# EAGLE board CT_schematic (EAGLE 7.6.0)

Size 100 x 80 mm. Coordinates in mm from the lower left corner, seen from the top.
Outline: 0,0 100,0 100,80 0,80 0,0
Copper layers (1*16): Top 0.035mm / dielectric 1.5mm / Bottom 0.035mm
Design rules "default": minimum track width 10mil, minimum drill 24mil, track to track 8mil, track to pad 8mil, pad to pad 8mil, via to via 8mil, smd to smd 8mil, copper to edge 40mil, drill to drill 8mil, minimum pad ring 10mil, minimum via ring 8mil, stop-mask expansion 4mil, vias tented up to drill 0mil, thermal gap 10mil

## Footprints (pad centres in the part's own frame; a part is rotated, then mirrored left to right if it is on the bottom)
C0603 = smd 0.8 x 0.8: 1 -0.762,0; 2 0.762,0
C0402 = smd 0.5 x 0.5: 1 -0.508,0; 2 0.508,0
C0805 = smd 1.2 x 1.3: 1 -1.016,0; 2 1.016,0
C1210 = smd 1.2 x 2.5: 1 -1.524,0; 2 1.524,0
R0603 = smd 0.8 x 0.8: 1 -0.762,0; 2 0.762,0
EXV-9H = smd 3.505 x 1.676: 1 -2.857,0; 2 2.857,0
L0603 = smd 0.8 x 0.8: 1 -0.762,0; 2 0.762,0
PJ-037B_PACKAGE = drill 3.7 square: 1 12,0 | drill 3.2 square: 2 6,0
LQFP144 = smd 0.35 x 1.35: 1 -8.75,-10.625; 2 -8.25,-10.625; 3 -7.75,-10.625; 4 -7.25,-10.625; 5 -6.75,-10.625; 6 -6.25,-10.625; 7 -5.75,-10.625; 8 -5.25,-10.625; 9 -4.75,-10.625; 10 -4.25,-10.625; 11 -3.75,-10.625; 12 -3.25,-10.625; 13 -2.75,-10.62; 14 -2.25,-10.625; 15 -1.75,-10.625; 16 -1.25,-10.625; 17 -0.75,-10.625; 18 -0.25,-10.625; 19 0.25,-10.625; 20 0.75,-10.625; 21 1.25,-10.625; 22 1.75,-10.625; 23 2.25,-10.625; 24 2.75,-10.62; 25 3.25,-10.625; 26 3.75,-10.625; 27 4.25,-10.625; 28 4.75,-10.625; 29 5.25,-10.625; 30 5.75,-10.625; 31 6.25,-10.625; 32 6.75,-10.625; 33 7.25,-10.625; 34 7.75,-10.625; 35 8.25,-10.625; 36 8.75,-10.625; 73 8.75,10.625; 74 8.25,10.625; 75 7.75,10.625; 76 7.25,10.625; 77 6.75,10.625; 78 6.25,10.625; 79 5.75,10.625; 80 5.25,10.625; 81 4.75,10.625; 82 4.25,10.625; 83 3.75,10.625; 84 3.25,10.625; 85 2.75,10.625; 86 2.25,10.625; 87 1.75,10.625; 88 1.25,10.625; 89 0.75,10.625; 90 0.25,10.625; 91 -0.25,10.625; 92 -0.75,10.625; 93 -1.25,10.625; 94 -1.75,10.625; 95 -2.25,10.625; 96 -2.75,10.625; 97 -3.25,10.625; 98 -3.75,10.625; 99 -4.25,10.625; 100 -4.75,10.625; 101 -5.25,10.625; 102 -5.75,10.625; 103 -6.25,10.625; 104 -6.75,10.625; 105 -7.25,10.625; 106 -7.75,10.625; 107 -8.25,10.625; 108 -8.75,10.625 | smd 1.35 x 0.35: 37 10.625,-8.75; 38 10.625,-8.25; 39 10.625,-7.75; 40 10.625,-7.25; 41 10.625,-6.75; 42 10.625,-6.25; 43 10.625,-5.75; 44 10.625,-5.25; 45 10.625,-4.75; 46 10.625,-4.25; 47 10.625,-3.75; 48 10.625,-3.25; 49 10.625,-2.75; 50 10.625,-2.25; 51 10.625,-1.75; 52 10.625,-1.25; 53 10.625,-0.75; 54 10.625,-0.25; 55 10.625,0.25; 56 10.625,0.75; 57 10.625,1.25; 58 10.625,1.75; 59 10.625,2.25; 60 10.625,2.75; 61 10.625,3.25; 62 10.625,3.75; 63 10.625,4.25; 64 10.625,4.75; 65 10.625,5.25; 66 10.625,5.75; 67 10.625,6.25; 68 10.625,6.75; 69 10.625,7.25; 70 10.625,7.75; 71 10.625,8.25; 72 10.625,8.75; 109 -10.625,8.75; 110 -10.625,8.25; 111 -10.625,7.75; 112 -10.625,7.25; 113 -10.625,6.75; 114 -10.625,6.25; 115 -10.625,5.75; 116 -10.625,5.25; 117 -10.625,4.75; 118 -10.625,4.25; 119 -10.625,3.75; 120 -10.625,3.25; 121 -10.625,2.75; 122 -10.625,2.25; 123 -10.625,1.75; 124 -10.625,1.25; 125 -10.625,0.75; 126 -10.625,0.25; 127 -10.625,-0.25; 128 -10.625,-0.75; 129 -10.625,-1.25; 130 -10.625,-1.75; 131 -10.625,-2.25; 132 -10.625,-2.75; 133 -10.625,-3.25; 134 -10.625,-3.75; 135 -10.625,-4.25; 136 -10.625,-4.75; 137 -10.625,-5.25; 138 -10.625,-5.75; 139 -10.625,-6.25; 140 -10.625,-6.75; 141 -10.625,-7.25; 142 -10.625,-7.75; 143 -10.625,-8.25; 144 -10.625,-8.75
A2500R24A00GM = smd 1.5 x 0.61: 1 -3,7; 2 -3,6; 3 -3,5; 4 -3,4; 5 -3,3; 6 -3,2; 7 -3,1; 8 -3,0; 17 5.22,0; 18 5.22,1; 19 5.22,2; 20 5.22,3; 21 5.22,4; 22 5.22,5; 23 5.22,6; 24 5.22,7 | smd 0.61 x 1.5: 9 -2.39,-1.6; 10 -1.39,-1.6; 11 -0.39,-1.6; 12 0.61,-1.6; 13 1.61,-1.6; 14 2.61,-1.6; 15 3.61,-1.6; 16 4.61,-1.6 | smd 1 x 1: 25 -2.8,9; 26 -2.8,13; 27 5.02,9; 28 5.02,13; 29 0.11,5.75; 30 2.11,5.75
AT24C02D = smd 1.6 x 0.6: 1 -2.475,1.905 | smd 1.55 x 0.6: 2 -2.475,0.635; 3 -2.475,-0.635; 4 -2.475,-1.905; 5 2.475,-1.905; 6 2.475,-0.635; 7 2.475,0.635; 8 2.475,1.905
SOIC-8 = smd 1.6 x 0.6: 1 -2.7,1.905 | smd 1.55 x 0.6: 2 -2.7,0.635; 3 -2.7,-0.635; 4 -2.7,-1.905; 5 2.7,-1.905; 6 2.7,-0.635; 7 2.7,0.635; 8 2.7,1.905
182-009-MALE = drill 1.194 pad 1.524 octagon: 1 -5.537,10.923; 2 -2.769,10.923; 3 0,10.923; 4 2.769,10.923; 5 5.537,10.923; 6 -4.153,8.08; 7 -1.384,8.08; 8 1.384,8.08; 9 4.153,8.08 | hole 3.048: -12.446,9.501; 12.446,9.501
VFBGA-63 = smd 0.4 x 0.4: A1 -3.6,4.4; A2 -2.8,4.4; A9 2.8,4.4; A10 3.6,4.4; B1 -3.6,3.6; B9 2.8,3.6; B10 3.6,3.6; C3 -2,2.8; C4 -1.2,2.8; C5 -0.4,2.8; C6 0.4,2.8; C7 1.2,2.8; C8 2,2.8; D3 -2,2; D4 -1.2,2; D5 -0.4,2; D6 0.4,2; D7 1.2,2; D8 2,2; E3 -2,1.2; E4 -1.2,1.2; E5 -0.4,1.2; E6 0.4,1.2; E7 1.2,1.2; E8 2,1.2; F3 -2,0.4; F4 -1.2,0.4; F5 -0.4,0.4; F6 0.4,0.4; F7 1.2,0.4; F8 2,0.4; G3 -2,-0.4; G4 -1.2,-0.4; G5 -0.4,-0.4; G6 0.4,-0.4; G7 1.2,-0.4; G8 2,-0.4; H3 -2,-1.2; H4 -1.2,-1.2; H5 -0.4,-1.2; H6 0.4,-1.2; H7 1.2,-1.2; H8 2,-1.2; J3 -2,-2; J4 -1.2,-2; J5 -0.4,-2; J6 0.4,-2; J7 1.2,-2; J8 2,-2; K3 -2,-2.8; K4 -1.2,-2.8; K5 -0.4,-2.8; K6 0.4,-2.8; K7 1.2,-2.8; K8 2,-2.8; L1 -3.6,-3.6; L2 -2.8,-3.6; L9 2.8,-3.6; L10 3.6,-3.6; M1 -3.6,-4.4; M2 -2.8,-4.4; M9 2.8,-4.4; M10 3.6,-4.4
ABS07-32.768KHZ-7-T = smd 1.1 x 2.4: 1 -2.5,0; 2 0,0
ASFL1 = smd 1.7 x 1.5: 1 -1.27,-1.1; 2 1.27,-1.1; 3 1.27,1.1; 4 -1.27,1.1
WSON-8 = smd 0.3 x 0.6: 1 -0.75,0; 2 0.05,0; 3 0.85,0; 4 1.65,0; 5 1.65,3.8; 6 0.85,3.8; 7 0.05,3.8; 8 -0.75,3.8 | smd 3 x 2.6: PAD 0.45,1.9
SON-6 = smd 0.55 x 0.3: 1 -0.355,0.5 | smd 0.52 x 0.3: 2 -0.37,0; 3 -0.37,-0.5; 4 0.37,-0.5; 5 0.37,0; 6 0.37,0.5
SW_4-1437565-2 = smd 1.4 x 2.1: 1 -2.23,4.55; 2 -2.23,-4.55; 3 2.23,4.55; 4 2.23,-4.55
LGM67K-G1J2-24-Z = smd 0.8 x 1.4: A -2,0; C 0,0
NC7SZ125M5X = smd 1.3 x 0.7: 1 -1.3,0.95; 2 -1.3,0; 3 -1.3,-0.95; 4 1.3,-0.95; 5 1.3,0.95
DUMMY_PACKAGE_199 = drill 0.3: 1 0,-1; 2 1.5,-1; 3 3,-1

## Placement (x,y rotation side)
C1  1e-06  [C0603]  -80.01,83.82 0 top  (outside the outline)
C2  1e-07  [C0603]  -83.82,83.82 0 top  (outside the outline)
C3  1e-07  [C0603]  -15.24,88.9 0 top  (outside the outline)
C4  1e-07  [C0603]  -19.05,88.9 0 top  (outside the outline)
C5  1e-07  [C0603]  -22.86,88.9 0 top  (outside the outline)
C6  1e-07  [C0603]  -26.67,88.9 0 top  (outside the outline)
C7  1e-07  [C0603]  -30.48,88.9 0 top  (outside the outline)
C8  1e-07  [C0603]  -34.29,88.9 0 top  (outside the outline)
C9  1e-07  [C0603]  -38.1,88.9 0 top  (outside the outline)
C10  1e-07  [C0603]  -41.91,88.9 0 top  (outside the outline)
C11  1e-07  [C0603]  -45.72,88.9 0 top  (outside the outline)
C12  1e-07  [C0603]  -49.53,88.9 0 top  (outside the outline)
C13  1e-07  [C0603]  -53.34,88.9 0 top  (outside the outline)
C14  4.7e-06  [C0603]  -64.77,83.82 0 top  (outside the outline)
C15  2.2e-06  [C0603]  -68.58,83.82 0 top  (outside the outline)
C16  2.2e-06  [C0603]  -72.39,83.82 0 top  (outside the outline)
C17  1e-08  [C0603]  -57.15,88.9 0 top  (outside the outline)
C18  1e-06  [C0603]  -60.96,88.9 0 top  (outside the outline)
C19  1e-07  [C0603]  -64.77,88.9 0 top  (outside the outline)
C20  1e-11  [C0402]  -41.91,93.98 0 top  (outside the outline)
C21  1e-11  [C0402]  -45.72,93.98 0 top  (outside the outline)
C22  1e-05  [C0805]  -83.82,71.12 0 top  (outside the outline)
C23  1e-08  [C0402]  -49.53,93.98 0 top  (outside the outline)
C24  1e-06  [C0603]  -68.58,88.9 0 top  (outside the outline)
C25  1e-06  [C0603]  -72.39,88.9 0 top  (outside the outline)
C26  1e-07  [C0402]  -53.34,93.98 0 top  (outside the outline)
C27  1e-07  [C0402]  -57.15,93.98 0 top  (outside the outline)
C28  1e-07  [C0402]  -60.96,93.98 0 top  (outside the outline)
C29  1e-07  [C0402]  -64.77,93.98 0 top  (outside the outline)
C30  2.2e-06  [C0603]  -76.2,83.82 0 top  (outside the outline)
C31  1e-08  [C0402]  -68.58,93.98 0 top  (outside the outline)
C32  1e-08  [C0402]  -72.39,93.98 0 top  (outside the outline)
C33  1e-05  [C1210]  -59.69,72.39 0 top  (outside the outline)
C34  1e-05  [C0805]  -15.24,78.74 0 top  (outside the outline)
C35  8e-07  [R0603]  -76.2,88.9 0 top  (outside the outline)
C36  1e-05  [C1210]  -66.04,72.39 0 top  (outside the outline)
C37  8e-07  [R0603]  -80.01,88.9 0 top  (outside the outline)
C38  1e-05  [C1210]  -72.39,72.39 0 top  (outside the outline)
C39  1e-07  [C0402]  -76.2,93.98 0 top  (outside the outline)
C40  0.0001  [EXV-9H]  -72.39,63.5 0 top  (outside the outline)
C41  0.0001  [EXV-9H]  -17.78,72.39 0 top  (outside the outline)
C42  1e-08  [C0402]  -80.01,93.98 0 top  (outside the outline)
F1  240.0  [L0603]  -83.82,88.9 0 top  (outside the outline)
J1  PJ-037B  [PJ-037B_PACKAGE]  -67.31,33.02 0 top  (outside the outline)
R2  1000.0  [R0603]  -15.24,93.98 0 top  (outside the outline)
R4  4700.0  [R0603]  -19.05,93.98 0 top  (outside the outline)
R5  2200.0  [R0603]  -22.86,93.98 0 top  (outside the outline)
R6  2200.0  [R0603]  -26.67,93.98 0 top  (outside the outline)
R7  10000.0  [R0603]  -66.04,78.74 0 top  (outside the outline)
R8  10000.0  [R0603]  -71.12,78.74 0 top  (outside the outline)
R9  10000.0  [R0603]  -76.2,78.74 0 top  (outside the outline)
R10  10000.0  [R0603]  -81.28,78.74 0 top  (outside the outline)
R11  10000.0  [R0603]  -15.24,83.82 0 top  (outside the outline)
R12  10000.0  [R0603]  -20.32,83.82 0 top  (outside the outline)
R13  120.0  [R0603]  -30.48,93.98 0 top  (outside the outline)
R14  10000.0  [R0603]  -25.4,83.82 0 top  (outside the outline)
R15  10000.0  [R0603]  -30.48,83.82 0 top  (outside the outline)
R16  10000.0  [R0603]  -35.56,83.82 0 top  (outside the outline)
R17  10000.0  [R0603]  -40.64,83.82 0 top  (outside the outline)
R18  10000.0  [R0603]  -45.72,83.82 0 top  (outside the outline)
R19  100000.0  [R0603]  -25.4,78.74 0 top  (outside the outline)
R20  806.0  [R0603]  -34.29,93.98 0 top  (outside the outline)
R21  1000.0  [R0603]  -38.1,93.98 0 top  (outside the outline)
R22  100000.0  [R0603]  -30.48,78.74 0 top  (outside the outline)
R23  153694.38  [R0603]  -20.32,78.74 0 top  (outside the outline)
R24  100000.0  [R0603]  -35.56,78.74 0 top  (outside the outline)
R25  100000.0  [R0603]  -40.64,78.74 0 top  (outside the outline)
R26  300000.0  [R0603]  -45.72,78.74 0 top  (outside the outline)
R27  100000.0  [R0603]  -50.8,78.74 0 top  (outside the outline)
R28  10000.0  [R0603]  -50.8,83.82 0 top  (outside the outline)
R29  10000.0  [R0603]  -55.88,83.82 0 top  (outside the outline)
R30  82000.0  [R0603]  -60.96,83.82 0 top  (outside the outline)
R31  300000.0  [R0603]  -55.88,78.74 0 top  (outside the outline)
R32  120000.0  [R0603]  -60.96,78.74 0 top  (outside the outline)
U1  STM32F746ZET6  [LQFP144]  -45.72,11.43 0 top  (outside the outline)
U2  A2500R24A00GM  [A2500R24A00GM]  -27.94,7.62 0 top  (outside the outline)
U3  AT24C02D-SSHM-T  [AT24C02D]  -44.45,53.34 0 top  (outside the outline)
U4  MCP2562-E/SN  [SOIC-8]  -58.42,53.34 0 top  (outside the outline)
U5  182-009-113R531  [182-009-MALE]  -36.83,31.75 0 top  (outside the outline)
U6  mt29f4g08abbdah4  [VFBGA-63]  -73.66,31.75 0 top  (outside the outline)
U7  ABS07-32.768KHZ-7-T  [ABS07-32.768KHZ-7-T]  -39.37,72.39 0 top  (outside the outline)
U8  ASFL1-25MHZ-NCS  [ASFL1]  -63.5,63.5 0 top  (outside the outline)
U9  LP3878SDX-ADJ/NOPB  [WSON-8]  -80.01,50.8 0 top  (outside the outline)
U10  LP2951ACSDX/NOPB  [WSON-8]  -29.21,62.23 0 top  (outside the outline)
U11  LP2951ACSDX/NOPB  [WSON-8]  -46.99,62.23 0 top  (outside the outline)
U12  TPS3895ADRYR  [SON-6]  -20.32,97.79 0 top  (outside the outline)
U13  4-1437565-2  [SW_4-1437565-2]  -27.94,53.34 0 top  (outside the outline)
U14  Q65110A2395  [LGM67K-G1J2-24-Z]  -48.26,72.39 0 top  (outside the outline)
U15  nc7sz125m5x  [NC7SZ125M5X]  -77.47,71.12 0 top  (outside the outline)
U16  Dummy  [DUMMY_PACKAGE_199]  -17.78,99.06 0 top  (outside the outline)

## Library data of the parts
C1-C42 F1 J1 R2 R4-R32 U1-U16 = circuit_tree

## Nets
CLK_CRYSTAL_U1_8: C20.1 U1.8 U7.1
CLK_CRYSTAL_U1_9: C21.1 U1.9 U7.2
CLK_U1_23: U1.23 U8.3
GND: C1.2 C2.2 C3.2 C4.2 C5.2 C6.2 C7.2 C8.2 C9.2 C10.2 C11.2 C12.2 C13.2 C14.2 C15.2 C16.2 C17.2 C18.2 C19.2 C20.2 C21.2 C22.2 C23.2 C24.2 C25.2 C26.2 C27.2 C28.2 C29.2 C30.2 C31.2 C32.2 C33.2 C34.2 C35.2 C36.2 C37.2 C38.2 C39.2 C40.2 C41.2 C42.2 J1.2 R2.2 R7.2 R9.2 R11.2 R12.2 R21.2 R24.2 R27.2 R30.2 R32.2 U1.16 U1.31 U1.38 U1.51 U1.61 U1.83 U1.94 U1.107 U1.120 U1.130 U2.8 U2.17 U3.4 U4.2 U4.8 U5.5 U6.C5 U6.F7 U6.K3 U6.K8 U8.2 U9.3 U9.PAD U10.3 U10.4 U10.PAD U11.3 U11.4 U11.PAD U12.2 U14.C U15.1 U15.3 U16.1
NET_U1_25: R4.1 U1.25 U15.4
NET_U1_33: C17.1 C18.1 F1.1 U1.32 U1.33
NET_U1_71: C15.1 U1.71
NET_U1_106: C16.1 U1.106
NET_U1_136: R5.1 U1.136 U3.6
NET_U1_137: R6.1 U1.137 U3.5
NET_U1_138: R7.1 U1.138
NET_U1_141: U14.A
NET_U1_142: U13.3 U13.4
NET_U1_143: R8.1 U1.143
NET_U3_1: R10.1 U3.1
NET_U3_2: R11.1 U3.2
NET_U3_3: R12.1 U3.3
NET_U3_7: R9.1 U3.7
NET_U4_6: R13.2 U4.6
NET_U5_2: R13.2 U4.6 U5.2
NET_U5_3: R13.1 U4.7 U5.3
NET_U6_C3: R18.1 U6.C3
NET_U9_1: C32.1 U9.1
NET_U9_6: R20.2 R21.1 U9.6
NET_U9_8: R19.1 U9.8
NET_U10_5: R22.1 U10.5
NET_U10_7: R23.2 R24.1 U10.7
NET_U11_5: R25.1 U11.5
NET_U11_7: R26.2 R27.1 U11.7
NET_U12_1: R29.1 R30.1 U12.1
NET_U12_3: R31.2 R32.1 U12.3
NET_U12_4: R28.1 U12.4 U15.2
NET_U13_1: R2.1 U13.1 U13.2
PROC_CAN1_RX: U1.103 U4.4
PROC_CAN1_TX: U1.104 U4.1
PROC_FMC_A16: U1.80 U6.D5
PROC_FMC_A17: U1.81 U6.C4
PROC_FMC_D0: U1.85 U6.H4
PROC_FMC_D1: U1.86 U6.J4
PROC_FMC_D2: U1.114 U6.K4
PROC_FMC_D3: U1.115 U6.K5
PROC_FMC_D4: U1.58 U6.K6
PROC_FMC_D5: U1.59 U6.J7
PROC_FMC_D6: U1.60 U6.K7
PROC_FMC_D7: U1.63 U6.J8
PROC_FMC_INT: R14.1 U1.92 U6.C8
PROC_FMC_NCE: R15.1 U1.124 U6.C6
PROC_FMC_NOE: R17.1 U1.118 U6.D4
PROC_FMC_NWE: R16.1 U1.119 U6.C7
PROC_SPI1_MISO: U1.42 U2.10
PROC_SPI1_MOSI: U1.43 U2.11
PROC_SPI1_NSS: U1.40 U2.12
PROC_SPI1_SCK: U1.41 U2.9
PROC_TIM1_CH2: U1.64 U16.2
PROC_TIM1_CH4: U1.67 U16.3
VCC_S1_14V9: C33.1 C35.1 C37.1 C40.1 C41.1 J1.1 R19.2 U9.4 U10.8 U11.8
VCC_TIER1_1V8: C1.1 C2.1 C3.1 C4.1 C5.1 C6.1 C7.1 C8.1 C9.1 C10.1 C11.1 C12.1 C13.1 C14.1 C22.1 C23.1 C25.1 C26.1 C27.1 C28.1 C29.1 C30.1 C34.1 C39.1 C42.1 F1.2 R4.2 R5.2 R6.2 R8.2 R10.2 R14.2 R15.2 R16.2 R17.2 R18.2 R20.1 R28.2 R29.2 R31.1 U1.6 U1.17 U1.30 U1.39 U1.52 U1.62 U1.72 U1.84 U1.108 U1.121 U1.131 U1.144 U2.18 U3.8 U4.5 U6.D3 U6.G4 U6.H8 U6.J6 U9.5 U12.6 U15.5
VCC_TIER1_3V3: C19.1 C31.1 C36.1 R22.2 R23.1 U1.95 U8.4 U10.1
VCC_TIER1_5V0: C24.1 C38.1 R25.2 R26.1 U4.3 U11.1

## Tracks (layer width: path | path; a pad name or v marks a point on that pad's centre or on a via)
CLK_CRYSTAL_U1_8  (2 unrouted)
CLK_CRYSTAL_U1_9  (2 unrouted)
CLK_U1_23  (1 unrouted)
GND  (86 unrouted)
NET_U1_25  (2 unrouted)
NET_U1_33  (4 unrouted)
NET_U1_71  (1 unrouted)
NET_U1_106  (1 unrouted)
NET_U1_136  (2 unrouted)
NET_U1_137  (2 unrouted)
NET_U1_138  (1 unrouted)
NET_U1_142  (1 unrouted)
NET_U1_143  (1 unrouted)
NET_U3_1  (1 unrouted)
NET_U3_2  (1 unrouted)
NET_U3_3  (1 unrouted)
NET_U3_7  (1 unrouted)
NET_U4_6  (1 unrouted)
NET_U5_2  (2 unrouted)
NET_U5_3  (2 unrouted)
NET_U6_C3  (1 unrouted)
NET_U9_1  (1 unrouted)
NET_U9_6  (2 unrouted)
NET_U9_8  (1 unrouted)
NET_U10_5  (1 unrouted)
NET_U10_7  (2 unrouted)
NET_U11_5  (1 unrouted)
NET_U11_7  (2 unrouted)
NET_U12_1  (2 unrouted)
NET_U12_3  (2 unrouted)
NET_U12_4  (2 unrouted)
NET_U13_1  (2 unrouted)
PROC_CAN1_RX  (1 unrouted)
PROC_CAN1_TX  (1 unrouted)
PROC_FMC_A16  (1 unrouted)
PROC_FMC_A17  (1 unrouted)
PROC_FMC_D0  (1 unrouted)
PROC_FMC_D1  (1 unrouted)
PROC_FMC_D2  (1 unrouted)
PROC_FMC_D3  (1 unrouted)
PROC_FMC_D4  (1 unrouted)
PROC_FMC_D5  (1 unrouted)
PROC_FMC_D6  (1 unrouted)
PROC_FMC_D7  (1 unrouted)
PROC_FMC_INT  (2 unrouted)
PROC_FMC_NCE  (2 unrouted)
PROC_FMC_NOE  (2 unrouted)
PROC_FMC_NWE  (2 unrouted)
PROC_SPI1_MISO  (1 unrouted)
PROC_SPI1_MOSI  (1 unrouted)
PROC_SPI1_NSS  (1 unrouted)
PROC_SPI1_SCK  (1 unrouted)
PROC_TIM1_CH2  (1 unrouted)
PROC_TIM1_CH4  (1 unrouted)
VCC_S1_14V9  (9 unrouted)
VCC_TIER1_1V8  (61 unrouted)
VCC_TIER1_3V3  (7 unrouted)
VCC_TIER1_5V0  (5 unrouted)